# EAGLE board envelope_detector (EAGLE 9.6.2)
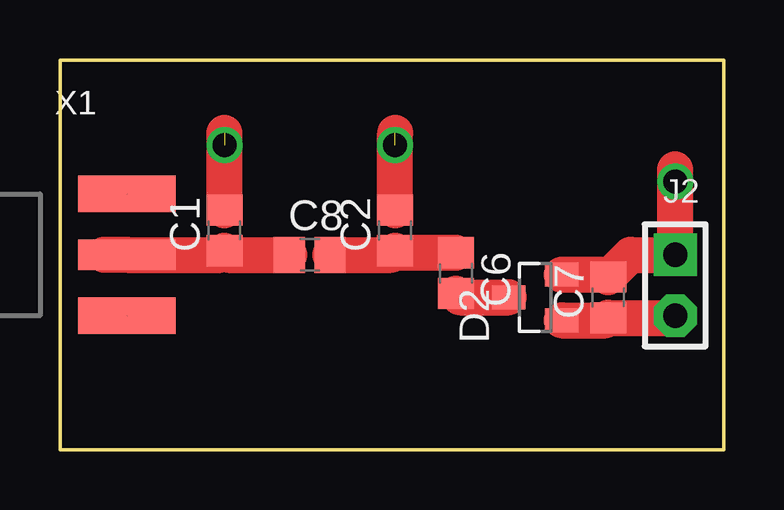
[diagram p0: board, top side]
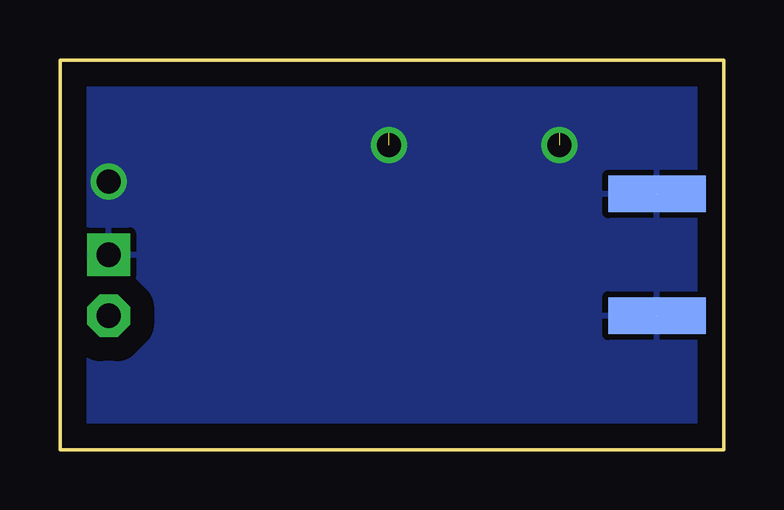
[diagram p1: board, bottom side, seen from below]

Size 27.69 x 16.26 mm. Coordinates in mm from the lower left corner, seen from the top.
Outline: 0,16.26 0,0 27.69,0 27.69,16.26 0,16.26
Copper layers (1*16): Top 0.035mm / dielectric 1.5mm / Bottom 0.035mm
Design rules "default": minimum track width 6mil, minimum drill 0.35mm, track to track 6mil, track to pad 6mil, pad to pad 6mil, via to via 6mil, smd to smd 6mil, copper to edge 40mil, drill to drill 6mil, minimum pad ring 10mil, minimum via ring 8mil, stop-mask expansion 4mil, vias tented up to drill 0mil, thermal gap 10mil

## Footprints (pad centres in the part's own frame; a part is rotated, then mirrored left to right if it is on the bottom)
C0805 = smd 1.3 x 1.5: 1 -0.85,0; 2 0.85,0
SOT23 = smd 1 x 1.4: 1 -0.95,-1.1; 2 0.95,-1.1; 3 0,1.1
SIP-100-02-40 = drill 1.016 pad 1.778 square: 1 -1.27,0 | drill 1.016 pad 1.778 octagon: 2 1.27,0
SMA_EDGELAUNCH = smd 4.064 x 1.524: GND@1 2.032,-2.54; GND@2 2.032,2.54 | smd 4.064 x 1.524 bottom: GND@3 2.032,2.54; GND@4 2.032,-2.54 | smd 4.064 x 1.27: P 2.032,0

## Placement (x,y rotation side)
C1  [C0805]  6.86,9.14 90 top
C2  [C0805]  13.97,9.14 90 top
C6  [C0805]  16.51,7.37 270 top
C7  [C0805]  22.86,6.35 90 top
C8  [C0805]  10.41,8.13 0 top
D2  BAS40-04  [SOT23]  19.81,6.35 90 top
J2  F-1X02-SIP-100-40  [SIP-100-02-40]  25.65,6.86 270 top
X1  [SMA_EDGELAUNCH]  0.76,8.13 0 top

## Library data of the parts
C1 C2 C6-C8 X1 = adafruit
D2 = diode
J2 = con-headers-jp

## Nets
GND: C1.2 C2.2 C7.2 D2.2 J2.1 X1.GND@1 X1.GND@2 X1.GND@3 X1.GND@4
N$1: C7.1 D2.1 J2.2
N$7: C6.2 D2.3
N$10: C1.1 C8.1 X1.P
N$11: C2.1 C6.1 C8.2

## Tracks (layer width: path | path; a pad name or v marks a point on that pad's centre or on a via)
GND  (via drill 1)  (4 unrouted)
  Top 1.5: D2.2 22.76,7.3 C7.2 23.79,8.13 J2.1 25.65,11.68 | C1.2 6.86,13.21 | C2.2 13.97,13.21
  other vias: 6.86,12.7 13.97,12.7 25.65,11.18
  pour Bottom (isolate 1): 0,16.26 27.69,16.26 27.69,0 0,0
N$1
  Top 1.5: D2.1 22.76,5.4 C7.1 25.57,5.5 J2.2
N$7
  Top 1.5: C6.2 16.68,6.35 D2.3
N$10
  Top 1.5: C8.1 7.02,8.13 C1.1 6.69,8.13 X1.P 1.84,8.13
N$11
  Top 1.5: C8.2 13.8,8.13 C2.1 14.05,8.22 C6.1